# Altium PCB PCB1.PcbDoc
Units mm, origin at the board's own origin, x right, y up, seen from the top; angles counter-clockwise.
Board outline 42.16 x 60.2 mm, 2 copper layers (Top Layer, Bottom Layer); 19 components, 14 nets, 55 pads, 12 vias.
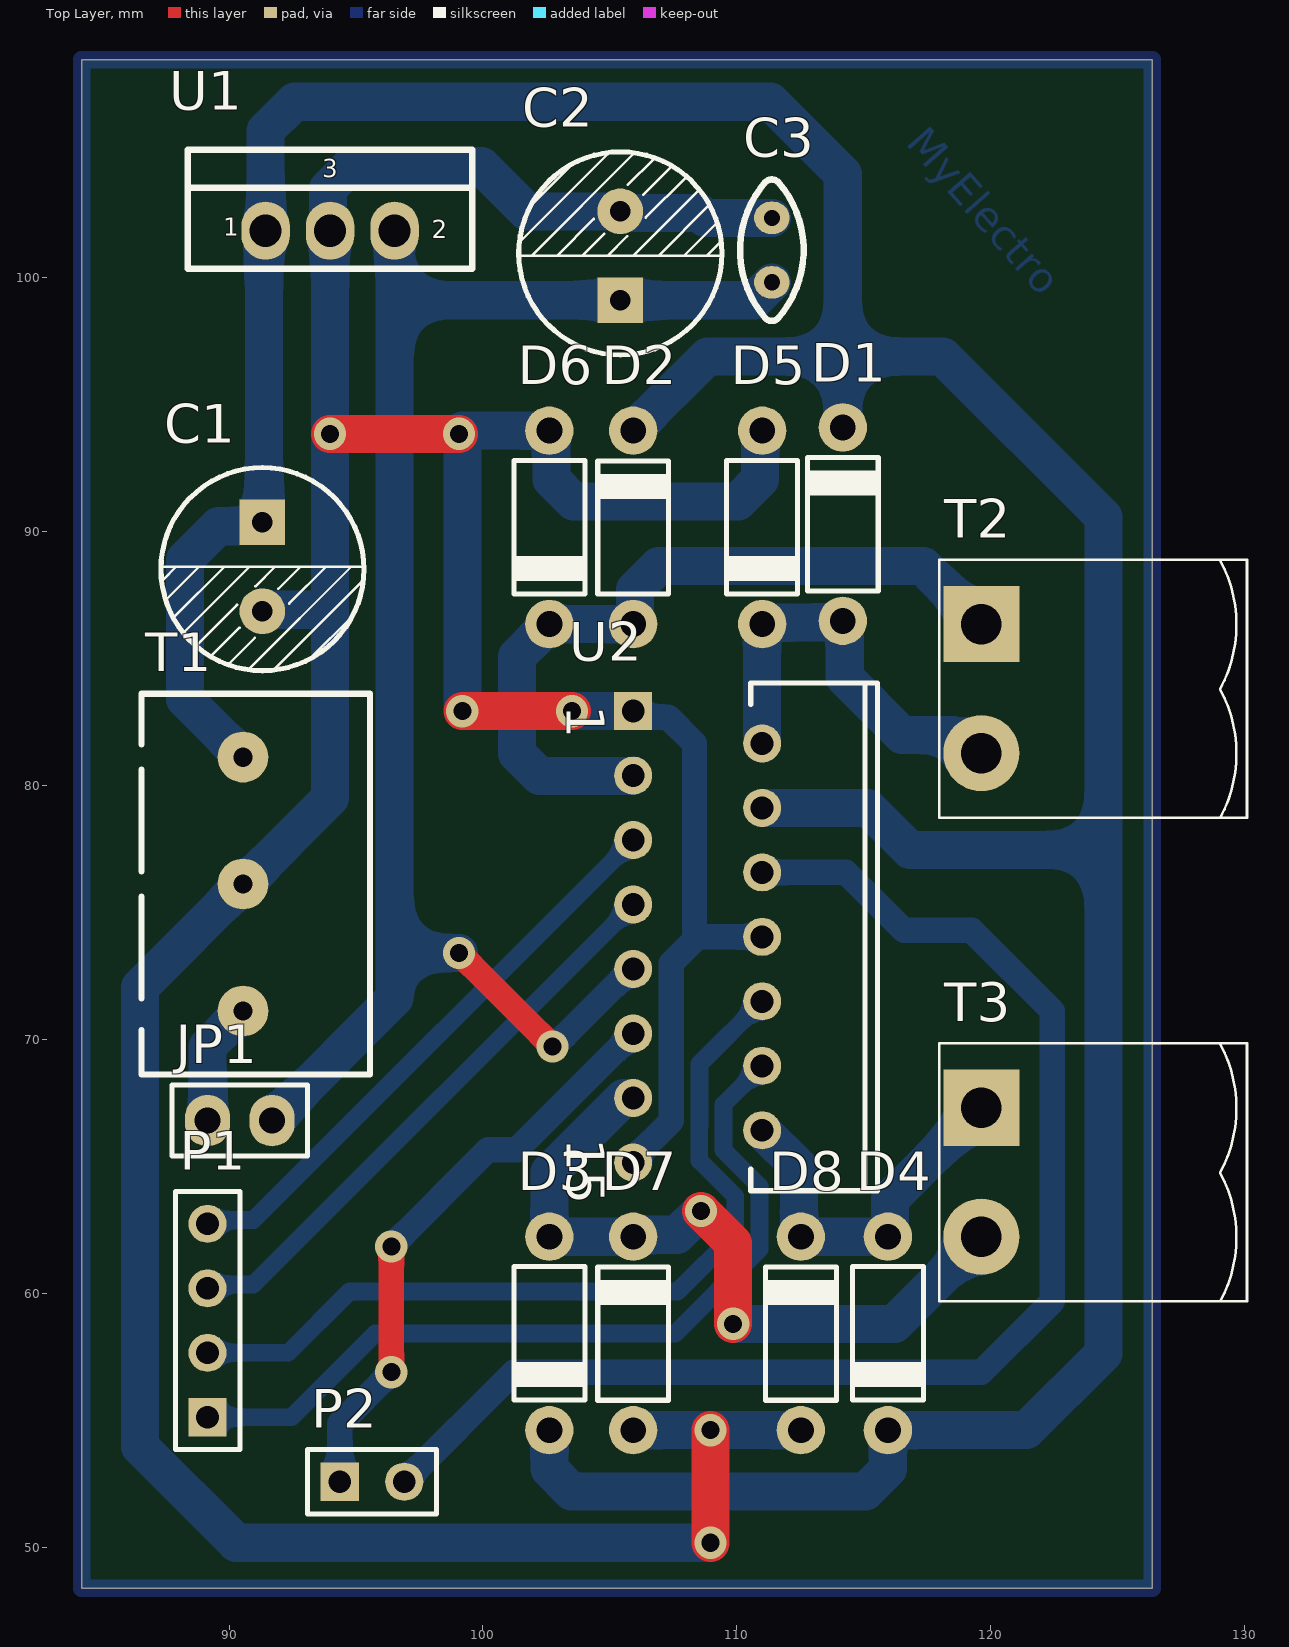
[diagram p0: Top Layer view]
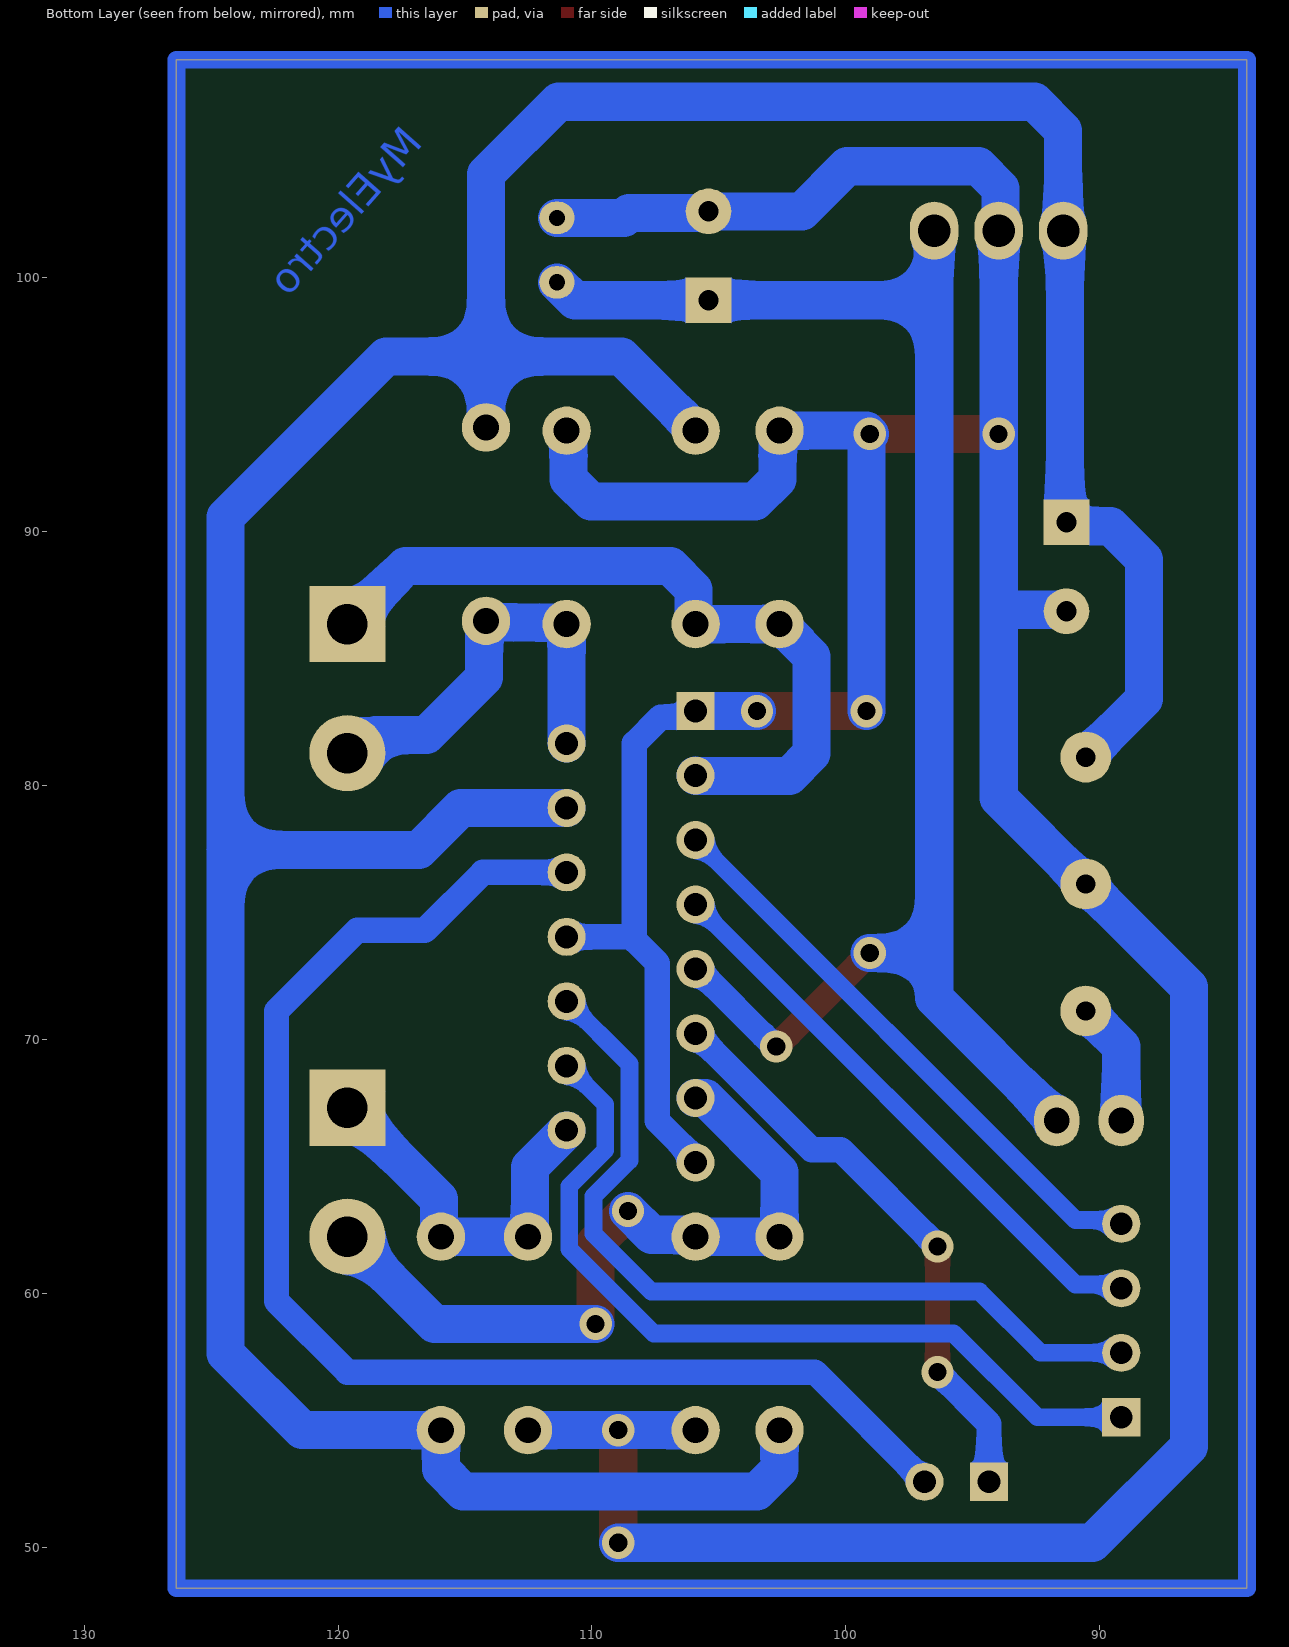
[diagram p1: Bottom Layer view, seen from below]
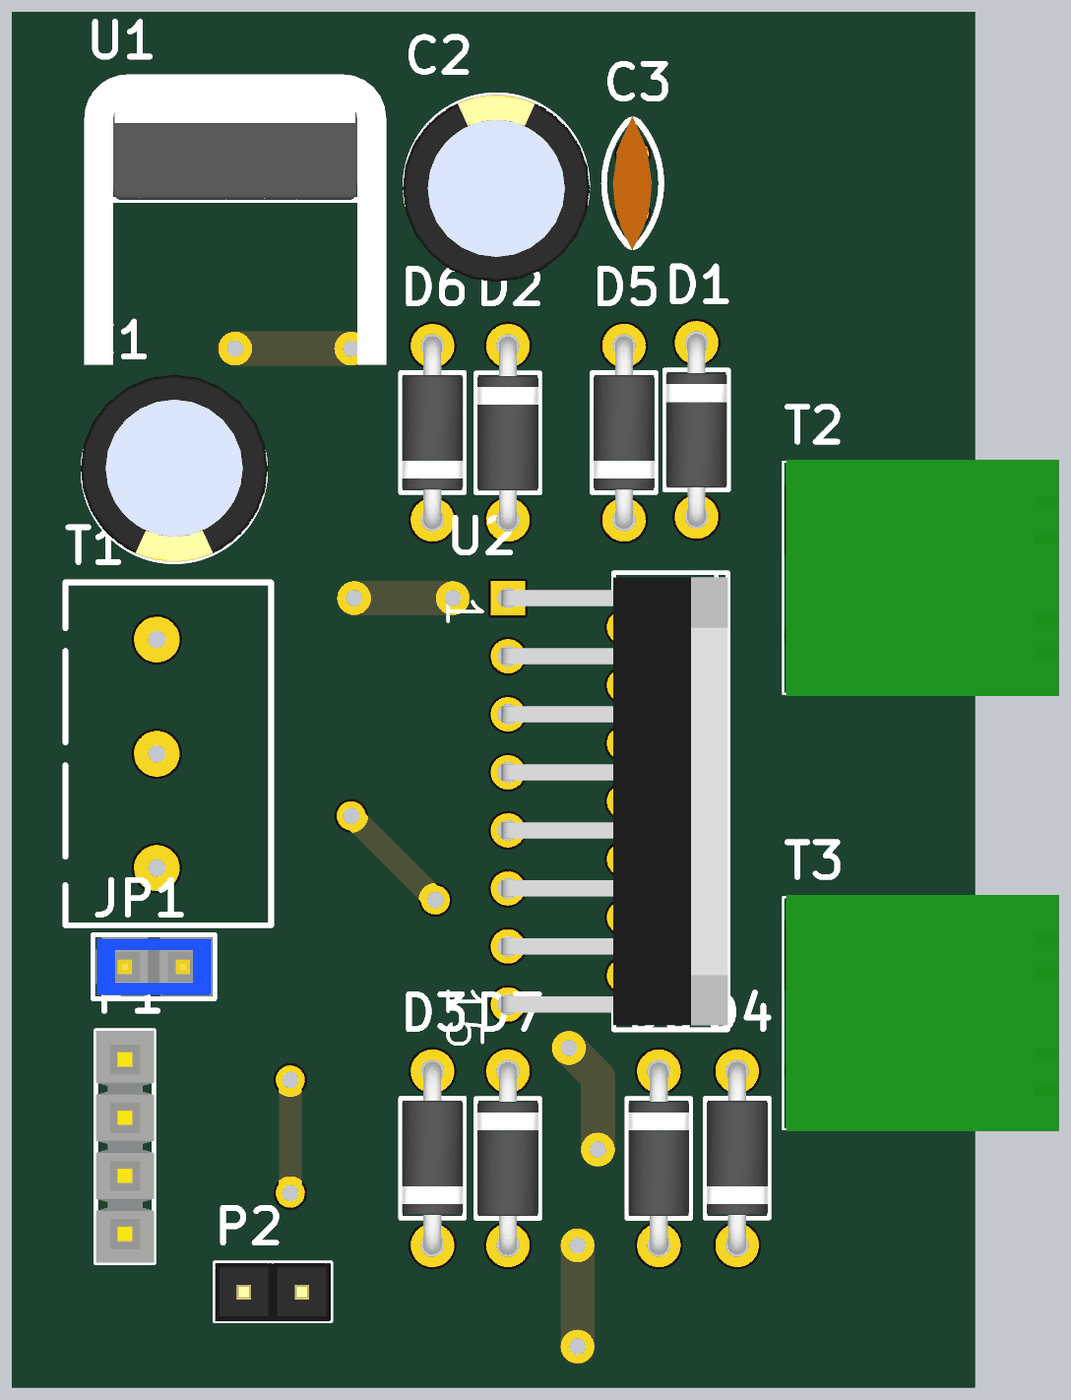
[diagram p2: 3D render of the assembled board from above, using the file's embedded part models]

## Layer stack, top to bottom
Top Solder: solder mask 0.0102, Solder Resist, Dk 3.5
Top Layer: signal copper 0.0356
Dielectric 1: dielectric 0.32, FR-4, Dk 4.8
Bottom Layer: signal copper 0.0356
Bottom Solder: solder mask 0.0102, Solder Resist, Dk 3.5

## Board outline
84.201,48.387 126.365,48.387 126.365,108.585 84.201,108.585

## Design rules (kind name [scope] priority, off if disabled: settings)
Clearance [All] p1: gap=0.254 ignorepadtopadclearanceinfootprint=FALSE except(0: Arc-Hole Track-Hole SMDPad-Hole THPad-Hole Via-Hole Fill-Hole Poly-Hole Region-Hole Text-Hole)
PolygonConnect [All] p1: connectstyle=Relief reliefconductorwidth=0.254 reliefentries=4 polygonreliefangle="90 Angle" airgapwidth=0.254
RoutingVias [All] p1: holewidth=0.711 width=1.27 viastyle="Through Hole" minholewidth=0.711 minwidth=1.27 maxholewidth=0.711 maxwidth=1.27
SolderMaskExpansion [All] p1: expansion=0.102 istentingtop=FALSE
Width [All] p1: maxlimit=1.5 minlimit=0.7 preferedwidth=1
30 further rules are at their usual default settings.

## Components (designator, comment, footprint, x,y, rotation, side; value= is the part's Value field where it differs from the comment)
C1 "100uf" "Cap electrolitic radial 8x14-3.5" 91.313,88.618 r270 top value=1uF
C2 "100uf" "Cap electrolitic radial 8x14-3.5" 105.41,100.866 r90 top value=1uF
C3 "100nF" Cap-100nF 111.379,101.092 r270 top
D1 "1N4007" "Diode 1n4007" 114.173,86.487 r90 top
D2 "1N4007" "Diode 1n4007" 105.918,86.36 r90 top
D3 "1N4007" "Diode 1n4007" 102.616,62.23 r270 top
D4 "1N4007" "Diode 1n4007" 115.951,62.23 r270 top
D5 "1N4007" "Diode 1n4007" 110.998,93.98 r270 top
D6 "1N4007" "Diode 1n4007" 102.616,93.98 r270 top
D7 "1N4007" "Diode 1n4007" 105.918,54.61 r90 top
D8 "1N4007" "Diode 1n4007" 112.522,54.61 r90 top
JP1 "Jumper 2Pin" "Jumper Small - 2.54 - Blue" 90.424,66.802 r0 top
P1 "Header 4" HDR1X4 89.154,55.118 r90 top
P2 "Header 2" HDR1X2 94.361,52.578 r0 top
T1 "Terminal" "Terminal 1*3" 86.551,83.62 r270 top
T2 "PHOENIX" "MSTB 2,5/2-G" 119.634,86.36 r270 top
T3 "PHOENIX" "MSTB 2,5/2-G" 119.634,67.31 r270 top
U1 "L7805CV" 78XXCV 93.98,101.854 r0 top
U2 "L298N" Multiwatt15V 108.458,74.041 r270 top

## Footprints (in the part's own frame and the unit in brackets; to place one, negate y for a bottom-side part, rotate by r counter-clockwise, add the part's x,y. Pads: shape width x height; smd on the part's side, far side on the other; paste and mask are expansions set on the pad)
78XXCV [mil]
  oval 75x90 hole 50: 1(-100,0) 2(100,0) 3(0,0)
  silkscreen extent -221,-59 221,126, body extent -260,-343 260,157, height 890
"Cap electrolitic radial 8x14-3.5" [mm] "Cap electrolitic radial 8x14-3.5-Design:Abbas Basereh"
  rect 1.8x1.8 hole 0.8: 1(-1.75,0)
  round 1.8 hole 0.8: 2(1.75,0)
  silkscreen extent -3.9,-4 4.1,4, body extent -4.1,-4.1 4.1,4.1, height 14.6
Cap-100nF [mil] "Bipolar Capacitor-Design:Ali Hafizi"
  oval 50x55 hole 25: 1(-50,0) 2(50,0)
  silkscreen extent -110,-49 110,49, body extent -115,-34 115,33, height 272
"Diode 1n4007" [mil] "Diode 1N4007 : 1.0A RECTIFIER Case: DO-41 Case Material: Molded Plastic Terminals: Finish - Bright Tin Weight: 0.30 grams"
  round 75 hole 40: 1(0,0) 2(300,0)
  silkscreen extent 46,-55 253,55, body extent -16,-52 315,53, height 131
HDR1X2 [mm] "Connector; Header; 2 Position"
  rect 1.5x1.5 hole 0.9: 1(0,0)
  round 1.5 hole 0.9: 2(2.54,0)
  silkscreen extent -1.27,-1.27 3.81,1.27, body extent -1.27,-1.28 3.81,1.26, height 8.79
HDR1X4 [mm] "Connector; Header; 4 Position"
  rect 1.5x1.5 hole 0.9: 1(0,0)
  round 1.5 hole 0.9: 2(2.54,0) 3(5.08,0) 4(7.62,0)
  silkscreen extent -1.27,-1.27 8.89,1.27, body extent -1.27,-1.28 8.89,1.26, height 8.38
"Jumper Small - 2.54 - Blue" [mil]
  oval 70x80 hole 40: 1(-50,0) 2(50,0)
  silkscreen extent -105,-55 105,55, body extent -100,-50 100,50, height 337
"MSTB 2,5/2-G" [mm] "Header, Nominal current: 12 A Rated voltage (III/2): 320 V Number of positions: 2 Pitch: 5.08 mm Color: green Contact surface: Tin Assembly: Soldering"
  rect 3x3 hole 1.6: 1(0,0)
  round 3 hole 1.6: 2(5.08,0)
  silkscreen extent -2.54,-1.67 7.62,10.46, body extent -2.63,-1.54 7.7,10.39, height 7.88
Multiwatt15V [mm] "TO, Thru-Hole, Vertical, Heatsink Mounted; 15 Bent Staggered Leads; Pitch 1.27 mm"
  rect 1.5x1.5 hole 0.9: 1(-8.89,-2.54)
  round 1.5 hole 0.9: 2(-7.62,2.54) 3(-6.35,-2.54) 4(-5.08,2.54) 5(-3.81,-2.54) 6(-2.54,2.54) 7(-1.27,-2.54) 8(0,2.54) 9(1.27,-2.54) 10(2.54,2.54) 11(3.81,-2.54) 12(5.08,2.54) 13(6.35,-2.54) 14(7.62,2.54) 15(8.89,-2.54)
  silkscreen extent -10,2.09 10,7.09, body extent -9.8,-2.81 9.8,7.08, height 21.3
"Terminal 1*3" [mm]
  round 2 hole 0.762: 1(2.5,4) 2(7.5,4) 3(12.5,4)
  silkscreen extent 0,0 15,9

## Part data
C1 C2: library part "Cap ELECTROLITIC TOTAL SIZE", "Cap electrolitic radial", Data=16-12-2016, Designer="Abbas Basereh"
C3: library part "CAP CERAMIC TOTAL SIZE", "CAP Ceramic Total", Designer="Ali Hafizi"
D1 D2 D3 D4 D5 D6 D7 D8: library part "Diode DIP Package", "Diode DIP Package", Code_JEDEC=DO-204-AH, ComponentLink1Description="Manufacturer Link", ComponentLink1URL=http://www.fairchildsemi.com/, ComponentLink2Description=Datasheet, ComponentLink2URL=http://www.fairchildsemi.com/ds/1N%2F1N4148.pdf, DatasheetVersion=1997, LatestRevisionDate=17-Jul-2002, LatestRevisionNote="Re-released for DXP Platform.", PackageDescription="Diode, Axial; Body 3.8 x 1.9 mm (LxDia. max), Lead Dia. 0.53 mm (max)", Published=8-Jun-2000, Publisher="Altium Limited"
JP1: "Jumper, 2-Pin", Data=16-12-2016, Designer="Abbas Basereh"
P1: "Header, 4-Pin", LatestRevisionDate=17-Jul-2002, LatestRevisionNote="Re-released for DXP Platform.", Publisher="Altium Limited"
P2: "Header, 2-Pin", LatestRevisionDate=17-Jul-2002, LatestRevisionNote="Re-released for DXP Platform.", Publisher="Altium Limited"
T1: library part "Terminal 1*3", "Terminal 3 Pin 250VAC 16A", ComponentLinkURL=www.picpars.com, Designer="Seyed Mohsen Ghasemain", E-mail=picpars@gmail.com
T2 T3: library part CON_Phoenix_MSTB_02, "2 Pitch: 5.08 mm Color: green Contact surface: Tin Assembly", Manufacturer="PHOENIX CONTACT", Max Current="12 A", Voltage="320 V", Category=Connector, ComponentLink1Description="Header, Nominal current: 12 A Rated voltage (III/2): 320 V Number of positions: 2 Pitch: 5.08 mm Color: green Contact surface: Tin Assembly: Soldering  DESIGNER:ABBAS BASEREH", ComponentLink2Description=Reference, Connector type="PCB Terminal Block", Designer="ABBAS BASEREH", Mounting Technology=Through-Hole, PART.NO=PHOENIX, Pin Count=2, Positions=2, Revision 1=2017-3-1, Status=Unreleased
U1: library part L78XXCV, "Fixed Voltage Regulator", Adding Date=1387/01/06, Company=ControTec, Designer="Saeid Jorablo"
U2: "Dual Full Bridge Driver", Package Information="Latest Revision: Apr-1998", Package Reference=Multiwatt15H, Datasheet="Latest Revision: Jul-1999", Published=8-Jun-2000, Publisher="Altium Limited", Revision 1="24-Aug-2001: Footprint Added.", Revision 2="17-Jul-2002: Re-released for DXP Platform."

## Via types
v1: diameter 1.27, hole 0.711, Top Layer to Bottom Layer, 12 vias

## Nets (pads, with @x,y where several pads share a name; then routed paths per layer and width w, separated by ;. In a path a pad name is that pad's centre, name@x,y a point inside that pad or via, vN(x,y) a via of type N, cw(c..) or ccw(c..) an arc to the next point about the centre after c; other vN are vias at no path point)
+5: C2.1 C3.2 JP1.2 U1.2 U2.9 | length 64.4
  Top Layer w1: v1(99.06,73.406) v1(102.743,69.723)
  Bottom Layer w1: v1(102.743,69.723) 102.806,69.723 105.855,72.771 U2.9
  Bottom Layer w1.5: JP1.2 91.694,66.854 91.908,67.068 91.96,67.068 96.52,71.628 96.52,73.406 ; U1.2 96.52,99.116 ; v1(99.06,73.406) 96.52,73.406 ; C3.2 110.673,99.116 C2.1 96.52,99.116 ; 96.52,73.406 96.52,99.116
+12: C1.1 D1.2 D2.2 D3.2 D4.2 T1.1 U1.1 U2.4 | length 158.6
  Bottom Layer w1.5: T1.1 88.265,83.406 88.265,88.9 89.583,90.218 91.163,90.218 91.376,90.431 91.376,101.79 U1.1 91.44,105.801 92.573,106.934 111.326,106.934 114.173,104.087 114.173,96.901 ; D3.2 102.616,53.076 103.495,52.197 115.072,52.197 115.951,53.076 D4.2 ; D2.2 108.839,96.901 114.173,96.901 ; U2.4 115.169,79.121 116.82,77.47 124.44,77.47 ; D1.2 114.173,96.901 ; D4.2@115.841,54.61 121.412,54.61 124.44,57.638 124.44,77.47 ; 114.173,96.901 118.11,96.901 124.44,90.571 124.44,77.47
GND: C1.2 C2.2 C3.1 D5.1 D6.1 D7.1 D8.1 T1.2 U1.3 U2.1 U2.8 U2.15 | length 171.7
  Top Layer w1.5: v1(93.98,93.853) v1(99.06,93.853) ; v1(99.187,82.931) v1(103.505,82.931) ; v1(108.966,50.177) v1(108.966,54.61)
  Bottom Layer w1: U2.15 105.918,65.286 107.422,66.79 107.422,73.005 108.331,73.914 ; U2.1 106.157,82.692 107.3,82.692 108.331,81.661 108.331,73.914 ; U2.8 108.458,74.041 108.331,73.914
  Bottom Layer w1.5: C1.2 91.37,86.925 93.783,86.925 93.98,87.122 ; v1(99.187,82.931) 99.187,93.726 v1(99.06,93.853) 99.187,93.98 D6.1 102.693,93.903 102.693,92.065 103.572,91.186 110.042,91.186 110.921,92.065 110.921,93.903 D5.1 ; v1(103.505,82.931) U2.1 ; D7.1 v1(108.966,54.61) D8.1 ; v1(108.966,50.177) 90.285,50.177 86.487,53.975 86.487,72.056 T1.2 90.598,76.12 93.98,79.502 93.98,87.122 ; C3.1 108.745,102.362 108.549,102.559 105.467,102.559 C2.2 101.727,102.616 99.949,104.394 94.781,104.394 93.903,103.515 93.903,101.931 U1.3 v1(93.98,93.853) 93.98,87.122
NetD1_1: D1.1 D5.2 T2.2 U2.2 | length 16.8
  Bottom Layer w1.5: U2.2 D5.2 111.061,86.423 114.109,86.423 D1.1 114.25,86.41 114.25,84.251 116.514,81.987 118.521,81.987 119.228,81.28 T2.2
NetD2_1: D2.1 D6.2 T2.1 U2.3 | length 30.2
  Bottom Layer w1.5: U2.3 105.904,80.377 102.225,80.377 101.346,81.256 101.346,85.09 D6.2 D2.1 105.995,86.437 105.995,87.723 106.918,88.646 117.348,88.646 T2.1
NetD3_1: D3.1 D7.2 T3.2 U2.13 | length 29.6
  Top Layer w1.5: v1(108.585,63.246) 109.855,61.976 v1(109.855,58.801)
  Bottom Layer w1.5: U2.13 105.537,67.691 102.616,64.77 D3.1 D7.2 105.995,62.307 107.646,62.307 v1(108.585,63.246) ; v1@109.86,58.796 116.2,58.796 T3.2
NetD4_1: D4.1 D8.2 T3.1 U2.14 | length 14.9
  Bottom Layer w1.5: U2.14 112.445,64.974 112.445,62.307 D8.2 D4.1 116.028,62.307 116.028,63.704 T3.1
NetJP1_1: JP1.1 T1.3 | length 4.9
  Bottom Layer w1.5: JP1.1 89.154,69.723 T1.3
NetP1_1: P1.1 U2.12 | length 32.9
  Bottom Layer w0.7: P1.1 92.456,55.118 95.758,58.42 107.569,58.42 110.893,61.744 110.893,64.216 109.477,65.632 109.477,66.212 109.48,66.216 109.48,67.443 U2.12
NetP1_2: P1.2 U2.10 | length 33.5
  Bottom Layer w0.7: P1.2 92.329,57.658 94.742,60.071 107.667,60.071 109.939,62.343 109.939,63.821 108.523,65.237 108.523,66.607 108.526,66.611 108.526,69.029 U2.10
NetP1_3: P1.3 U2.7 | length 23
  Bottom Layer w0.7: P1.3 89.303,60.347 90.954,60.347 U2.7
NetP1_4: P1.4 U2.5 | length 23
  Bottom Layer w0.7: P1.4 89.303,62.887 90.954,62.887 U2.5
NetP2_1: P2.1 U2.11 | length 23.1
  Top Layer w1: v1(96.393,56.896) v1(96.393,61.849)
  Bottom Layer w1: P2.1 94.361,54.864 v1(96.393,56.896) ; v1(96.393,61.849) 100.203,65.659 101.346,65.659 U2.11
NetP2_2: P2.2 U2.6 | length 53.6
  Bottom Layer w1: P2.2 101.219,56.896 119.634,56.896 122.428,59.69 122.428,71.12 119.253,74.295 116.586,74.295 114.3,76.581 U2.6
copper on no net: | length 204.6
  Bottom Layer w0.7: 84.201,108.585 84.201,48.387 126.365,48.387 126.365,108.585 84.328,108.585

## Other copper
Bottom Layer:
  text "MyElectro" at 116.609,105.272 h1.2 r311.48

## Text inside footprints (layer, text, board x,y; h text height)
U1: Top Overlay "3" at 93.68,103.954 h0.7; Top Overlay "2" at 97.98,101.554 h0.7; Top Overlay "1" at 89.78,101.654 h0.7
U2: Top Overlay "15" at 103.293,66.101 h1.5 r270; Top Overlay "1" at 103.293,83.161 h1.5 r270